# EAGLE board Main (EAGLE 9.2.2)
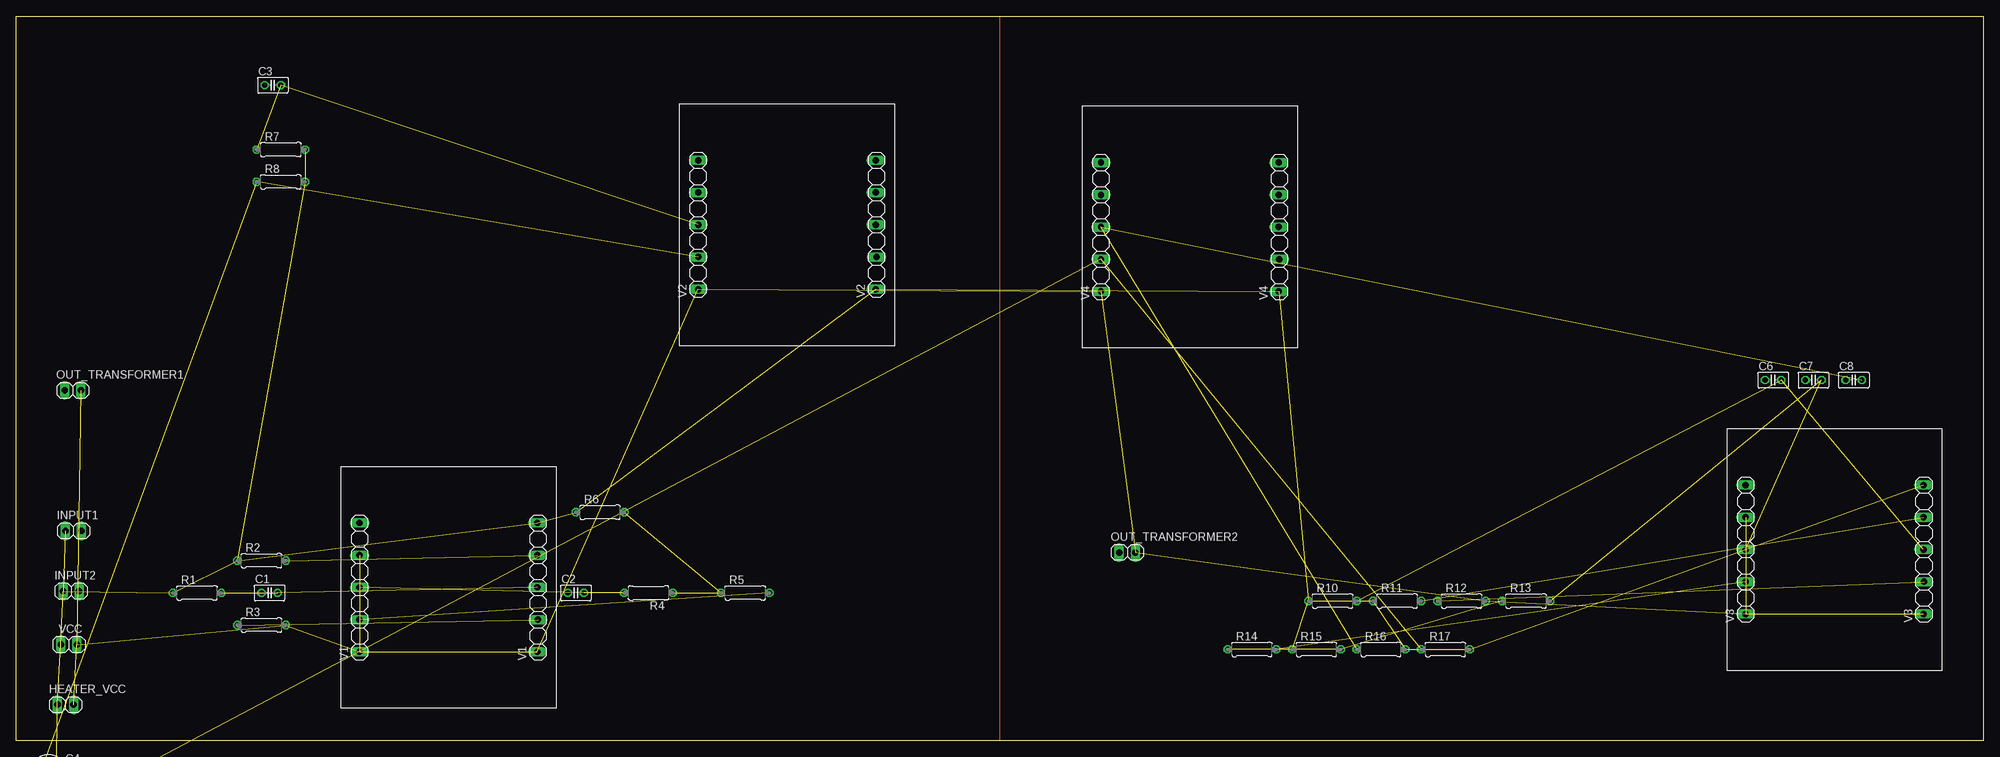
[diagram p0: board, top side]

Size 310 x 114 mm. Coordinates in mm from the lower left corner, seen from the top.
Outline: 0,0 310,0 310,114 0,114 0,0
Copper layers (1*16): Top 0.035mm / dielectric 1.5mm / Bottom 0.035mm
Design rules "default": minimum track width 6mil, minimum drill 0.35mm, track to track 6mil, track to pad 6mil, pad to pad 6mil, via to via 6mil, smd to smd 6mil, copper to edge 40mil, drill to drill 6mil, minimum pad ring 10mil, minimum via ring 8mil, stop-mask expansion 4mil, vias tented up to drill 0mil, thermal gap 10mil

## Footprints (pad centres in the part's own frame; a part is rotated, then mirrored left to right if it is on the bottom)
C025-025X050 = drill 0.813 octagon: 1 -1.27,0; 2 1.27,0
E2,5-6 = drill 0.813 pad 1.6: + -1.27,0 | drill 0.813 pad 1.6 octagon: - 1.27,0
1X02 = drill 1.016 long: 1 -1.27,0; 2 1.27,0
0207/7 = drill 0.813 octagon: 1 -3.81,0; 2 3.81,0
AT-MT9P = drill 1.016 long: 1 24.08,31; 2 19,31; 3 13.92,31; 4 8.84,31; 5 8.84,3; 6 13.92,2.9; 7 19,3; 8 24.08,3; 9 29.16,3; NC 29.16,31

## Placement (x,y rotation side)
C1  0.1u  [C025-025X050]  39.97,23.21 0 top
C2  0.1u  [C025-025X050]  88.23,23.21 0 top
C3  0.1u  [C025-025X050]  40.47,103.23 0 top
C4  220u  [E2,5-6]  5.14,-5.08 0 top  (outside the outline)
C5  220u  [E2,5-6]  5.14,-12.7 0 top  (outside the outline)
C6  0.1u  [C025-025X050]  276.84,56.76 0 top
C7  0.1u  [C025-025X050]  283.19,56.76 0 top
C8  0.1u  [C025-025X050]  289.54,56.76 0 top
HEATER_VCC  [1X02]  7.81,5.58 0 top
INPUT1  [1X02]  9.06,32.98 0 top
INPUT2  [1X02]  8.7,23.49 0 top
OUT_TRANSFORMER1  [1X02]  8.97,55.13 0 top
OUT_TRANSFORMER2  [1X02]  175.09,29.57 0 top
R1  220k  [0207/7]  28.54,23.21 0 top
R2  3.9k  [0207/7]  38.7,28.29 0 top
R3  51k  [0207/7]  38.7,18.13 0 top
R4  1M  [0207/7]  99.66,23.21 180 top
R5  1.5k  [0207/7]  114.9,23.21 0 top
R6  100k  [0207/7]  92.04,35.91 0 top
R7  220k  [0207/7]  41.74,93.07 0 top
R8  180  [0207/7]  41.74,87.99 0 top
R10  220k  [0207/7]  207.44,21.93 0 top
R11  3.9k  [0207/7]  217.6,21.93 0 top
R12  51k  [0207/7]  227.76,21.93 0 top
R13  1M  [0207/7]  237.92,21.93 0 top
R14  1.5k  [0207/7]  194.74,14.31 0 top
R15  100k  [0207/7]  204.9,14.31 0 top
R16  220k  [0207/7]  215.06,14.31 0 top
R17  180  [0207/7]  225.22,14.31 0 top
V1  [AT-MT9P]  85.15,5.08 90 top
V2  [AT-MT9P]  138.49,62.23 90 top
V3  [AT-MT9P]  303.51,11.04 90 top
V4  [AT-MT9P]  201.95,61.89 90 top
VCC  [1X02]  8.35,15.06 0 top

## Library data of the parts
C1-C8 HEATER_VCC INPUT1 INPUT2 OUT_TRANSFORMER1 OUT_TRANSFORMER2 R1-R8 R10-R17 V1-V4 VCC = VacuumTube

## Nets
GND: C4.- C5.- HEATER_VCC.1 INPUT1.1 INPUT2.1 R1.1 R2.1 R6.1 R7.2 R8.2 R10.1 R11.1 R15.1 R16.2 R17.2 V1.9 V2.5 V3.9 V4.5 VCC.1
N$1: R3.1 V1.6
N$2: R2.2 V1.8
N$3: INPUT2.2
N$4: INPUT1.2
N$5: C1.2 R1.2 V1.7
N$6: R5.2 V1.3
N$7: C1.1
N$8: R4.1 R5.1 R6.2
N$9: C2.2 R4.2 V1.2
N$10: C2.1
N$12: C3.1
N$13: C3.2 R7.1 V2.2
N$14: C4.+ R8.1 V2.3
N$15: V2.7
N$16: OUT_TRANSFORMER1.1
N$17: V2.9
N$18: OUT_TRANSFORMER2.1
N$19: R12.1 V3.6
N$20: R11.2 V3.8
N$21: C6.2 R10.2 V3.7
N$22: C6.1
N$23: R14.2 V3.3
N$24: R13.1 R14.1 R15.2
N$25: C7.2 R13.2 V3.2
N$26: C7.1
N$27: C8.1
N$28: C8.2 R16.1 V4.2
N$29: C5.+ R17.1 V4.3
N$30: V4.7
N$31: V4.9
VCC: HEATER_VCC.2 OUT_TRANSFORMER1.2 OUT_TRANSFORMER2.2 R3.2 R12.2 V1.1 V1.4 V1.5 V2.4 V3.1 V3.4 V3.5 V4.4 VCC.2

## Tracks (layer width: path | path; a pad name or v marks a point on that pad's centre or on a via)
GND  (19 unrouted)
N$1  (1 unrouted)
N$2  (1 unrouted)
N$5  (2 unrouted)
N$6  (1 unrouted)
N$8  (2 unrouted)
N$9  (2 unrouted)
N$13  (2 unrouted)
N$14  (2 unrouted)
N$19  (1 unrouted)
N$20  (1 unrouted)
N$21  (2 unrouted)
N$23  (1 unrouted)
N$24  (2 unrouted)
N$25  (2 unrouted)
N$28  (2 unrouted)
N$29  (2 unrouted)
N$32
  Top 0.152: 155,0 155,114
VCC  (13 unrouted)